# Altium PCB tach key h.PcbDoc
Units mm, origin at the board's own origin, x right, y up, seen from the top; angles counter-clockwise.
Board outline 151 x 86.38 mm, 2 copper layers (Top Layer, Bottom Layer); 48 components, 30 nets, 137 pads, 0 vias.
Unrouted connection lines stored in the file: 9.
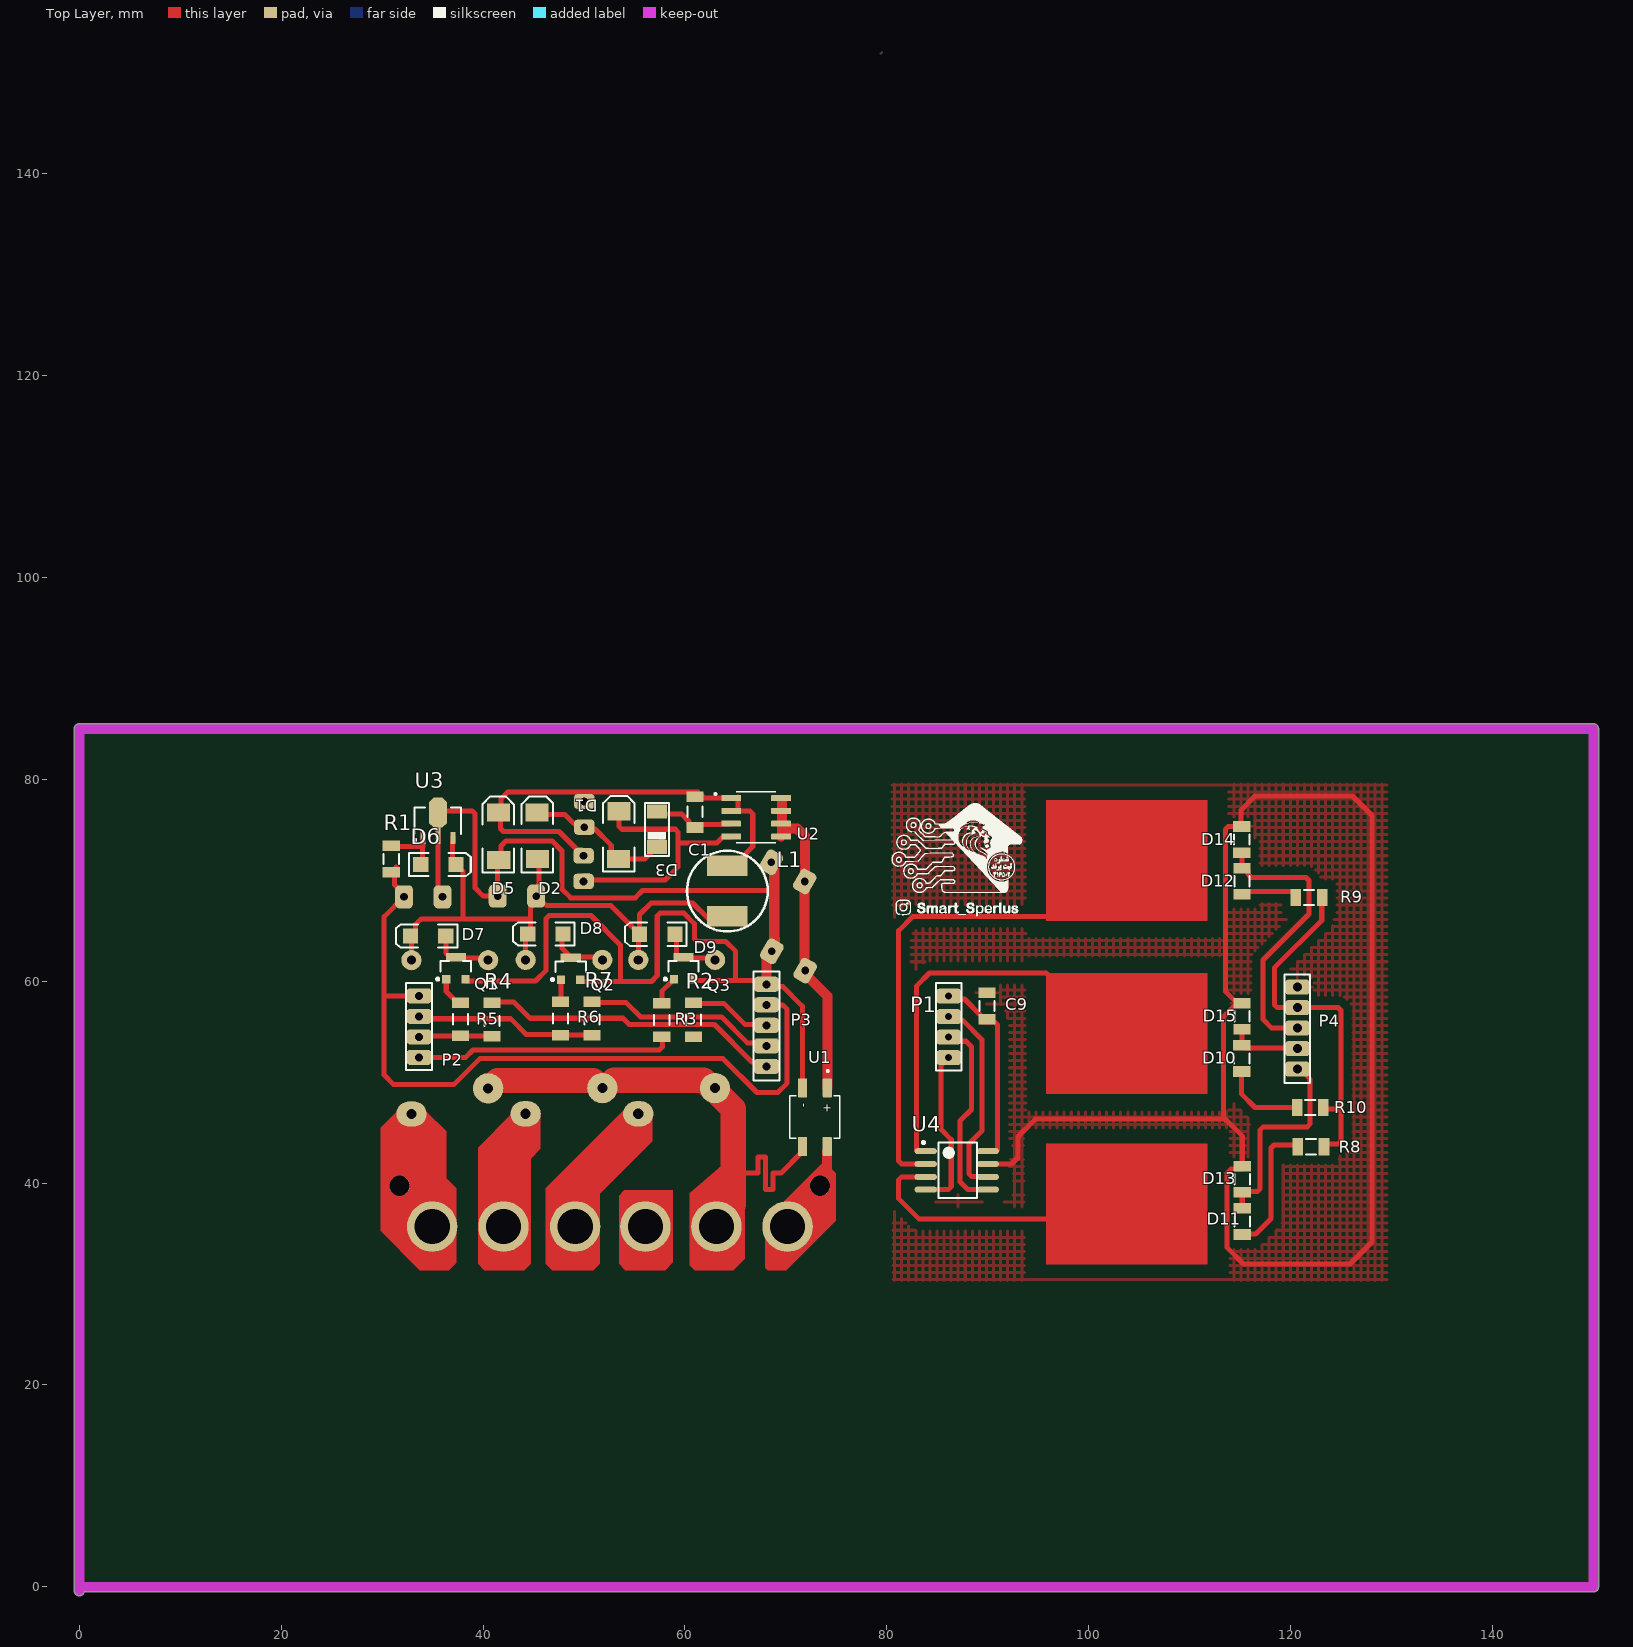
[diagram p0: Top Layer view]
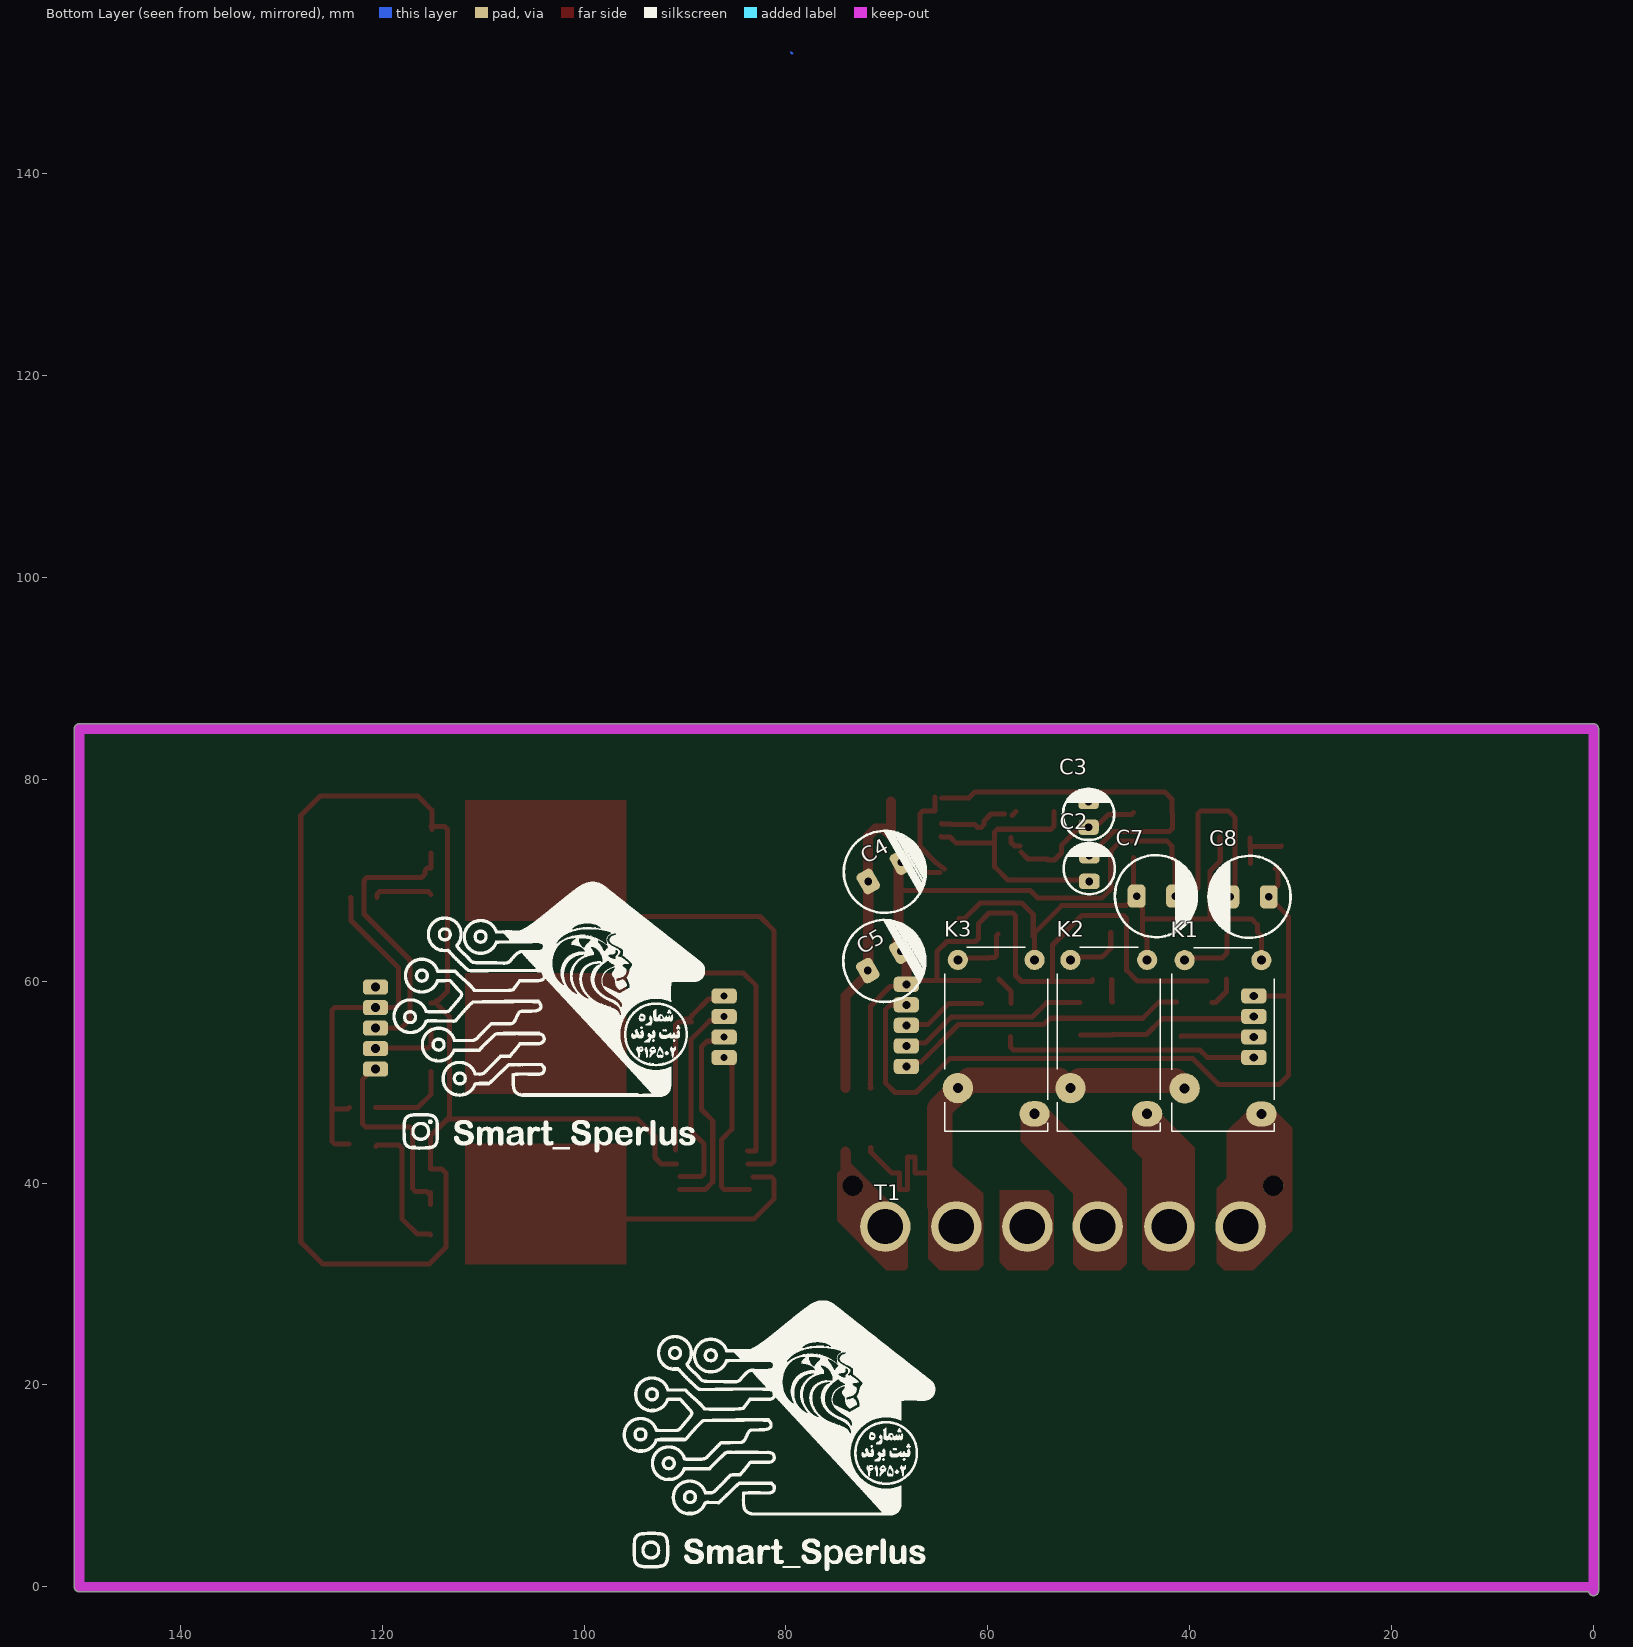
[diagram p1: Bottom Layer view, seen from below]
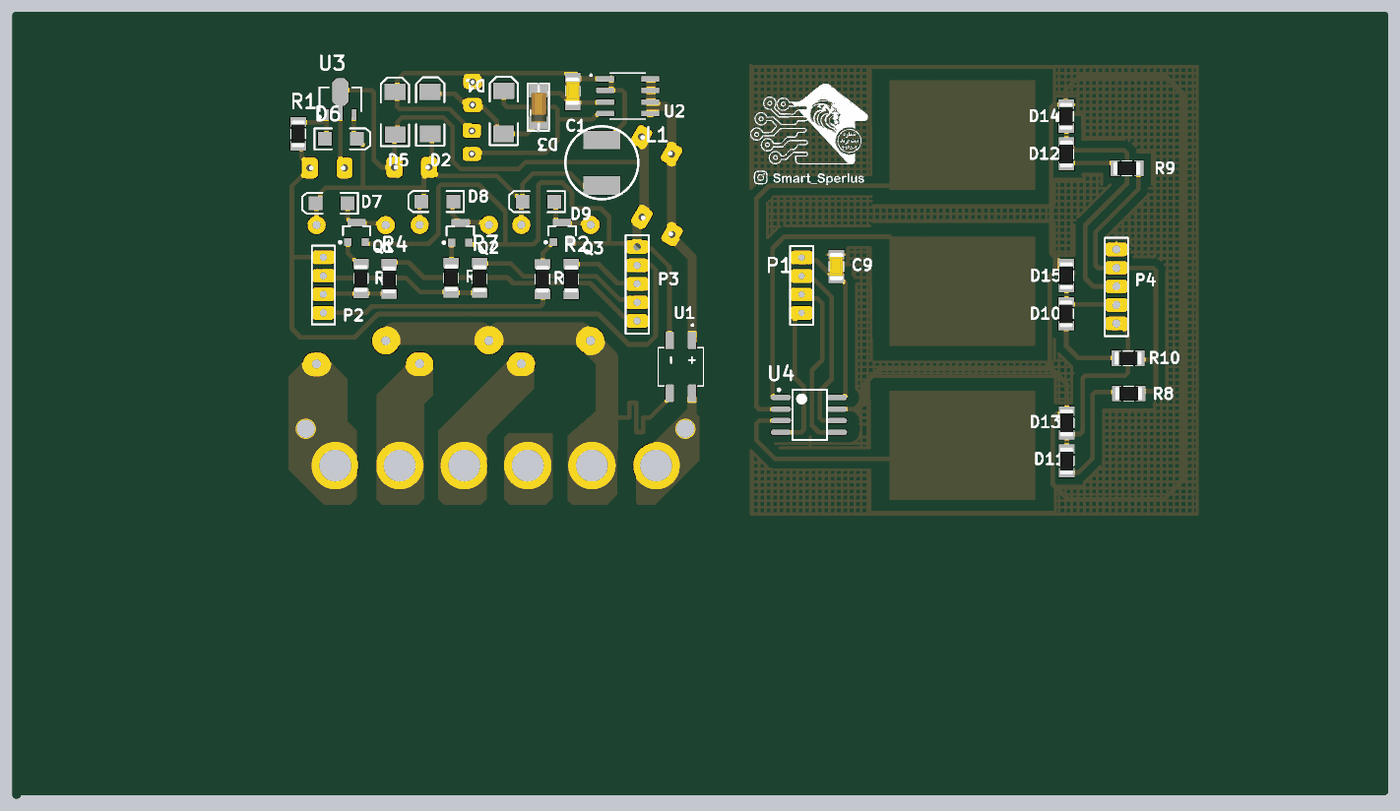
[diagram p2: 3D render of the assembled board from above, using the file's embedded part models]
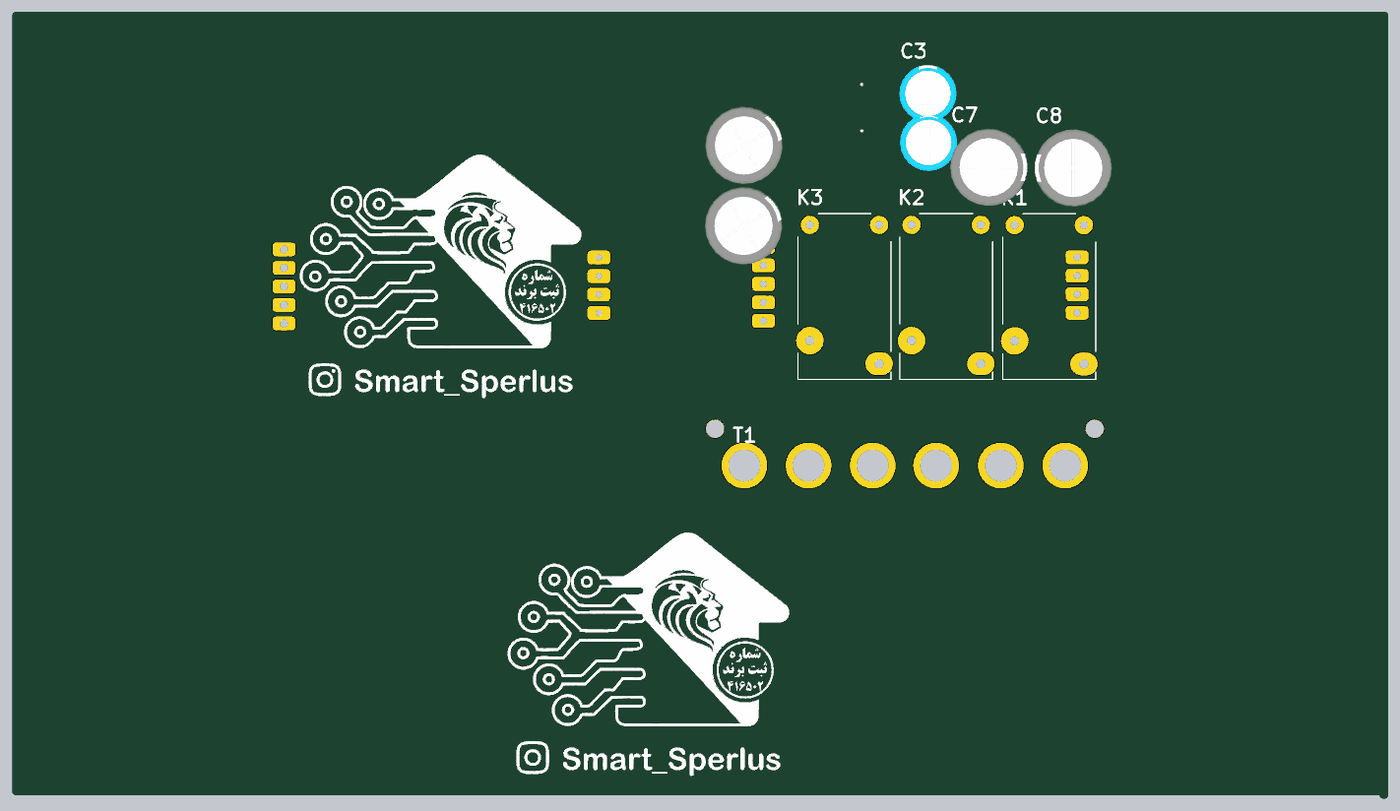
[diagram p3: 3D render of the assembled board from below, using the file's embedded part models]

## Layer stack, top to bottom
Top Solder: solder mask 0.0102, Solder Resist, Dk 3.5
Top Layer: signal copper 0.0356
Dielectric 1: dielectric 0.32, FR-4, Dk 4.8
Bottom Layer: signal copper 0.0356
Bottom Solder: solder mask 0.0102, Solder Resist, Dk 3.5

## Board outline
-0.5,-0.381 -0.5,85 cw(c0,85) 0,85.5 150,85.5 cw(c150,85) 150.5,85 150.5,0 cw(c150,0) 150,-0.5 0.486,-0.5 cw(c0,-0.381)

## Design rules (kind name [scope] priority, off if disabled: settings)
Clearance Clearance_1 [InPolygon] p1: gap=0.8 ignorepadtopadclearanceinfootprint=FALSE
Clearance [All] p2: gap=0.254 ignorepadtopadclearanceinfootprint=FALSE except(0: Arc-Hole Track-Hole SMDPad-Hole THPad-Hole Via-Hole Fill-Hole Poly-Hole Region-Hole Text-Hole)
PolygonConnect [All] p1: connectstyle=Relief reliefconductorwidth=0.254 reliefentries=4 polygonreliefangle="90 Angle" airgapwidth=0.254
RoomDefinition "tach key h" [InComponentClass('tach key h')] p1: confinementstyle=ConfineIn formatcopy=TRUE lockcomponents=FALSE outline 144.907,-4.953 247.904,-4.953 247.904,23.114 144.907,23.114
RoutingLayers [All] p1: top layer_v5=FALSE bottom layer_v5=TRUE
RoutingVias [All] p1: holewidth=0.711 width=2.5 viastyle="Through Hole" minholewidth=0.711 minwidth=1.27 maxholewidth=0.711 maxwidth=2
SolderMaskExpansion [All] p1: expansion=0.102 istentingtop=FALSE
SupplyNets "Schematic Supply Nets_2" [InNet('GND')] p1: voltage=0.000
SupplyNets "Schematic Supply Nets_1" [InNet('+12v')] p2: voltage=0.000
SupplyNets "Schematic Supply Nets" [InNet('vcc')] p3: voltage=0.000
Width [All] p1: maxlimit=3 minlimit=0.5 preferedwidth=1
29 further rules are at their usual default settings.

## Components (designator, comment, footprint, x,y, rotation, side; value= is the part's Value field where it differs from the comment)
C1 "=Value" "CAP 1206"#1 61,76.75 r90 top
C2 "=Value" ELEC-CAP-RAD10-20 49.95,71.15 r270 bottom
C3 "=Value" ELEC-CAP-RAD10-20 50.025,76.525 r270 bottom
C4 "=Value" ELEC-CAP-RAD15-30 70.2,70.825 r330 bottom
C5 "=Value" ELEC-CAP-RAD15-30 70.25,62 r330 bottom
C7 "=Value" ELEC-CAP-RAD15-30 43.35,68.425 r0 bottom
C8 "=Value" ELEC-CAP-RAD15-30 34.075,68.35 r180 bottom
C9 "=Value" "CAP 1206"#2 89.933,57.508 r90 top
D1 "D Schottky" SMB#1 53.45,74.45 r90 top
D2 "D Schottky" SMB#2 45.375,74.35 r90 top
D3 "Zener Diode" DO-35 57.259,77.557 r270 top
D5 "D Schottky" SMB#3 41.5,74.325 r90 top
D6 "D Tunnel1" 3.2X1.6X1.1 35.575,71.55 r0 top
D7 "D Tunnel1" 3.2X1.6X1.1 34.55,64.475 r180 top
D8 "D Tunnel1" 3.2X1.6X1.1 46.175,64.675 r180 top
D9 "D Tunnel1" 3.2X1.6X1.1 57.25,64.65 r180 top
D10 "MODEL" "RES 1206 (3216X08L)"#1 115.15,52.35 r90 top
D11 "MODEL" "RES 1206 (3216X08L)"#1 115.2,36.2 r90 top
D12 "MODEL" "RES 1206 (3216X08L)"#1 115.175,69.9 r90 top
D13 "MODEL" "RES 1206 (3216X08L)"#1 115.2,40.375 r90 top
D14 "MODEL" "RES 1206 (3216X08L)"#1 115.15,74.025 r90 top
D15 "MODEL" "RES 1206 (3216X08L)"#1 115.175,56.525 r90 top
K1 "2071508-1" RELAY_2071508-1 36.703,54.229 r270 bottom
K2 "2071508-1" RELAY_2071508-1 48.016,54.253 r270 bottom
K3 "2071508-1" RELAY_2071508-1 59.172,54.253 r270 bottom
L1 "1mH" HS1101 64.2,68.925 r90 top
P1 "Header 4" HDR1X4#1 86.123,51.666 r90 top
P2 "Header 4" HDR1X4#2 33.655,51.689 r90 top
P3 "Header 5" HDR1X5#1 68.072,50.546 r90 top
P4 "Header 5" HDR1X5#2 120.667,50.269 r90 top
Q1 "QNPN" SOT-23B_L 37.3,61.275 r90 top
Q2 "QNPN" SOT-23B_L 48.675,61.225 r90 top
Q3 "QNPN" SOT-23B_L 59.85,61.275 r90 top
R1 "10K" "RES 1206 (3216X08L)"#1 30.9,72.1 r90 top
R2 "10K" "RES 1206 (3216X08L)"#2 60.85,56.175 r270 top
R3 "10K" "RES 1206 (3216X08L)"#3 57.7,56.15 r270 top
R4 "10K" "RES 1206 (3216X08L)"#4 40.875,56.075 r270 top
R5 "10K" "RES 1206 (3216X08L)"#3 37.775,56.226 r270 top
R6 "10K" "RES 1206 (3216X08L)"#3 47.675,56.3 r270 top
R7 "10K" "RES 1206 (3216X08L)"#4 50.8,56.2 r270 top
R8 "10K" "RES 1206 (3216X08L)"#1 122,43.6 r0 top
R9 "10K" "RES 1206 (3216X08L)"#1 121.81,68.303 r0 top
R10 "10K" "RES 1206 (3216X08L)"#1 121.937,47.475 r0 top
T1 "Phoenix terminal" "phoenix terminal 6" 69.016,24.004 r180 bottom
U1 "MB6S" SOIC245P670X270-4N 72.875,46.525 r270 top
U2 "HT7A6312" SOIC127P599X175-8N 67.05,76.232 r0 top
U3 "LM1117MP-3.3" SOT89L 35.525,75.9 r90 top
U4 "ATtiny15L-1SC" 8S2_N 87.025,41.25 r0 top

## Footprints (in the part's own frame and the unit in brackets; to place one, negate y for a bottom-side part, rotate by r counter-clockwise, add the part's x,y. Pads: shape width x height; smd on the part's side, far side on the other; paste and mask are expansions set on the pad)
3.2X1.6X1.1 [mm] "SMT LED; 2 Flat Leads"
  rect 1.5x1.5 smd: 1(-1.75,0) 2(1.75,0)
  silkscreen extent -2.9,-1.15 3.2,1.15
8S2_N [mm] "SOP, 8-Leads, Body 5.3x5.3mm, Pitch 1.27mm, IPC Medium Density"
  oval 2.2x0.6 smd: 1(-3.175,1.905) 2(-3.175,0.635) 3(-3.175,-0.635) 4(-3.175,-1.905) 5(2.975,-1.905) 6(2.975,-0.635) 7(2.975,0.635) 8(2.975,1.905)
  silkscreen extent -3.52,-2.75 1.9,2.88, body extent -2.73,-2.75 2.73,2.75, height 2.16
"CAP 1206"#1 [mm]
  rect 1.05x1.7 smd: 1(-1.524,0) 2(1.524,0)
  silkscreen extent -0.47,-0.75 0.53,0.75, body extent -1.49,-0.77 1.55,0.75, height 0.75
"CAP 1206"#2 [mm]
  rect 1.05x1.7 smd: 1(-1.27,0) 2(1.326,0)
  silkscreen extent -0.47,-0.75 0.53,0.75, body extent -1.49,-0.77 1.55,0.75, height 0.75
DO-35 [mm]
  rect 1.397x2 smd: 1(0.765,-0.027) 2(4.265,-0.027)
  silkscreen extent -0.07,-1.2 5.15,1.15, body extent -0.17,-0.81 5.35,0.84, height 1.81
ELEC-CAP-RAD10-20 [mil]
  rrect50% 60x80 hole 30: 1(-50,0) 2(50,0)
  silkscreen extent -100,-100 100,100, body extent -124,-124 124,124, height 404
ELEC-CAP-RAD15-30 [mil]
  rrect50% 70x90 hole 30: 1(-75,0) 2(75,0)
  silkscreen extent -160,-160 160,160, body extent -167,-167 167,167, height 609
HDR1X4#1 [mm] "Connector; Header; 4 Position"
  rrect50% 1.5x2.5 hole 0.7: 1(0.762,0) 2(2.794,0) 3(4.826,0) 4(6.858,0)
  silkscreen extent -0.51,-1.27 8.13,1.27
HDR1X4#2 [mm] "Connector; Header; 4 Position"
  rrect50% 1.5x2.5 hole 0.8: 1(0.762,0) 2(2.794,0) 3(4.826,0) 4(6.858,0)
  silkscreen extent -0.51,-1.27 8.13,1.27
HDR1X5#1 [mm] "Connector; Header; 5 Position"
  rrect50% 1.5x2.5 hole 0.8: 1(1.016,0) 2(3.048,0) 3(5.08,0) 4(7.112,0) 5(9.144,0)
  silkscreen extent -0.38,-1.27 10.41,1.27
HDR1X5#2 [mm] "Connector; Header; 5 Position"
  rrect50% 1.5x2.5 hole 0.9: 1(1.016,0) 2(3.048,0) 3(5.08,0) 4(7.112,0) 5(9.144,0)
  silkscreen extent -0.38,-1.27 10.41,1.27
HS1101 [mm] "HUMIDITY SENSOR"
  rect 2x4 smd: 1(2.5,0) 2(-2.5,0)
  silkscreen extent -4,-4 4,4
"phoenix terminal 6" [mm] "6 terminals"
  round 5 hole 3.5: 1(-1.143,11.684) 2(5.897,11.684) 3(12.937,11.684) 4(19.897,11.684) 5(26.997,11.684) 6(34.057,11.684)
RELAY_2071508-1 [mm]
  round 2 hole 0.9: 1(-7.85,3.8) 2(-7.85,-3.8)
  oval 2.5x3 hole 1: 3(7.39,3.8)
  round 3 hole 1: 4(4.85,-3.8)
  silkscreen extent -9.1,-5.1 9.1,5.1
"RES 1206 (3216X08L)"#1 [mm] "Chip Resistor, 2-Leads, Body 3.2x1.6mm, IPC High Density _ (0.125 W)"
  rect 1.05x1.7 smd: 1(-1.295,0) 2(1.301,0)
  silkscreen extent -0.5,-0.75 0.5,0.75, body extent -1.52,-0.76 1.53,0.76, height 0.6
"RES 1206 (3216X08L)"#2 [mm] "Chip Resistor, 2-Leads, Body 3.2x1.6mm, IPC High Density _ (0.125 W)"
  rect 1.05x1.7 smd: 1(-1.675,0) 2(1.7,0)
  silkscreen extent -0.5,-0.75 0.5,0.75, body extent -1.52,-0.76 1.53,0.76, height 0.6
"RES 1206 (3216X08L)"#3 [mm] "Chip Resistor, 2-Leads, Body 3.2x1.6mm, IPC High Density _ (0.125 W)"
  rect 1.05x1.7 smd: 1(-1.651,0) 2(1.651,0)
  silkscreen extent -0.5,-0.75 0.5,0.75, body extent -1.52,-0.76 1.53,0.76, height 0.6
"RES 1206 (3216X08L)"#4 [mm] "Chip Resistor, 2-Leads, Body 3.2x1.6mm, IPC High Density _ (0.125 W)"
  rect 1.05x1.7 smd: 1(-1.775,0) 2(1.55,0)
  silkscreen extent -0.5,-0.75 0.5,0.75, body extent -1.52,-0.76 1.53,0.76, height 0.6
SMB#1 [mm] "DO-214-AA/SMB; 2 C-Bend Leads; Body 5.3 x 3.6 mm, inc. leads (LxW)"
  rect 1.8x2.3 smd: 1(-2.35,0.025) 2(2.375,0)
  silkscreen extent -3.6,-1.55 3.9,1.55
SMB#2 [mm] "DO-214-AA/SMB; 2 C-Bend Leads; Body 5.3 x 3.6 mm, inc. leads (LxW)"
  rect 1.8x2.3 smd: 1(-2.254,0) 2(2.371,0.025)
  silkscreen extent -3.58,-1.55 3.95,1.55
SMB#3 [mm] "DO-214-AA/SMB; 2 C-Bend Leads; Body 5.3 x 3.6 mm, inc. leads (LxW)"
  rect 1.8x2.3 smd: 1(-2.325,-0.05) 2(2.375,-0.025)
  silkscreen extent -3.57,-1.55 3.95,1.55
SOIC127P599X175-8N [mm]
  rrect25% 1.97x0.6 smd: 1(-2.47,1.905) 2(-2.47,0.635) 3(-2.47,-0.635) 4(-2.47,-1.905) 5(2.47,-1.905) 6(2.47,-0.635) 7(2.47,0.635) 8(2.47,1.905)
  silkscreen extent -4.14,-2.52 1.95,2.52
SOIC245P670X270-4N [mm]
  rrect23% 1.91x0.91 smd: 1(-2.9,1.225) 2(-2.9,-1.225) 3(2.9,-1.225) 4(2.9,1.225)
  silkscreen extent -4.68,-2.48 2.1,2.48
SOT89L [mm] "SOT89, 3-Leads, Body 4.5x2.4 mm, Pitch 1.5mm, Lead Span 4.1mm, IPC High Density"
  rect 1.2x0.5 smd: 1(-1.7,1.5) 3(-1.7,-1.5)
  rect 1.6x0.5 smd: 2(-1.5,0)
  oct 3x1.8 smd: 2(0.8,0)
  silkscreen extent -2.07,-2.3 1.3,2.42, body extent -1.3,-2.3 1.3,2.3, height 1.6
SOT-23B_L [mm] "SOT23, 3-Leads, Body 2.9x1.3mm, Pitch 0.95mm, Lead Span 2.4mm, IPC High Density"
  rect 0.85x0.8 smd: 1(-1.075,0.95) 2(-1.075,-0.95)
  rect 0.85x2 smd: 3(1.075,0)
  silkscreen extent -1.2,-1.5 0.7,1.92, body extent -0.7,-1.5 0.7,1.5, height 1.14

## Part data
C1 C9: library part Capacitor, "Capacitor"
C2 C3 C4 C5 C7 C8: library part "Capacitor Electrolytic", "Electrolytic Capacitor"
D1 D2 D5: "Schottky Diode", Code_JEDEC=DO-214-AA, LatestRevisionDate=17-Jul-2002, LatestRevisionNote="Re-released for DXP Platform.", PackageDescription="DO-214-AA/SMB; 2 C-Bend Leads; Body 5.3 x 3.6 mm, inc. leads (LxW)", PackageReference=SMB, Published=8-Jun-2000, Publisher="Altium Limited", Simulation ModelName=SKYDIODE, Simulation PortMap=(1:1),(2:2)
D6 D7 D8 D9: "Tunnel Diode - RLC Model", LatestRevisionDate=17-Jul-2002, LatestRevisionNote="Re-released for DXP Platform.", PackageDescription="SM LED; 2 Flat Leads", PackageReference=3.2X1.6X1.1, PackageVersion=Feb-2002, Published=8-Jun-2000, Publisher="Altium Limited", Simulation ModelName=DTUNNEL1, Simulation PortMap=(1:1),(2:2)
D10 D11 D12 D13 D14 D15: library part "LED 5mm", "Typical LED", COLOR=RED
K1 K2 K3: "Power Relay 5VDC 10A SPST-NO(18.2mm 10.2mm 15.2mm) THT", Package=Package, Availability=Unavailable, MF="TE Connectivity", MP=2071508-1, Price=None, SnapEDA_Link=https://www.snapeda.com/parts/2071508-1/TE%20Connectivity/view-part/4717165/?ref=snap
L1: library part Inductor, "Inductor", Code_IEC=1005, Code_JEITA=0402, LatestRevisionDate=17-Jul-2002, LatestRevisionNote="Re-released for DXP Platform.", PackageReference=0402-A, Published=8-Jun-2000, Publisher="Altium Limited", Simulation ModelName=INDUCTOR, Simulation PortMap=(1:1),(2:2)
P1 P2: "Header, 4-Pin", LatestRevisionDate=17-Jul-2002, LatestRevisionNote="Re-released for DXP Platform.", Publisher="Altium Limited"
P3 P4: "Header, 5-Pin", LatestRevisionDate=17-Jul-2002, LatestRevisionNote="Re-released for DXP Platform.", Publisher="Altium Limited"
Q1 Q2 Q3: "NPN Bipolar Transistor", LatestRevisionDate=29-May-2009, LatestRevisionNote="IPC-7351 Footprint Added.", PackageDescription="3-Pin SOT-23 Package 0.95 mm Pitch, 2.4 mm Lead Span", PackageReference=SOT-23B, PackageVersion=Aug-1999, Published=8-Jun-2000, Publisher="Altium Limited", Simulation ModelName=QNPN, Simulation PortMap=(1:1),(2:2),(3:3)
R1 R2 R3 R4 R5 R6 R7 R8 R9 R10: library part Resistor, "Resistor", Power="1/4 W", Tolerance=5%, Simulation ModelName="Model Name", Simulation PortMap=(1:1),(2:2)
T1: library part "Phoenix terminal 6", "Terminal 6 Pin", ComponentLinkURL=www.picpars.com, Designer="Seyed Mohsen Ghasemain", E-mail=picpars@gmail.com
U1: "Bridge Rectifier Single Phase Standard 600V Surface Mount 4-SOIC", Package="BESOP-4 Surge Components", Digi-Key_Part_Number=MB6SCT-ND, Digi-Key_Purchase_URL=https://www.digikey.com.tr/product-detail/en/on-semiconductor/MB6S/MB6SCT-ND/965654?utm_source=snapeda&utm_medium=aggregator&utm_campaign=symbol, MF="ON Semiconductor", MP=MB6S, SnapEDA_Link=https://www.snapeda.com/parts/MB6S/ON%20Semiconductor/view-part/2774209/?ref=snap
U2: library part Component_1
U3: "800mA Low-Dropout Linear Regulator", DigiKeyPartNumber=LM1117MP-3.3CT-ND, Manufacturer="National Semiconductor", PackageTopMarking=XYTT*N05A, PowerWise=N, Code_IPC=SOT223-4, Code_JEDEC=TO-261-AA, ComponentLink1Description="LM1117 Datasheet", ComponentLink1URL=http://www.national.com/ds/LM/LM1117.pdf, ComponentLink2Description="LM1117 Web Page", ComponentLink2URL=http://www.national.com/pf/LM/LM1117.html, ComponentLink3Description="MP04A Package Page", ComponentLink3URL=http://www.national.com/packaging/folders/mp04a.html, CompType="LDO IC", DatasheetVersion=Apr-2006, PackageDescription="Molded SOT-223, 6.50 x 3.56 x 1.6mm Body, 4 Lead, 2.3mm Pitch", PackageReference=MP04A, PackageVersion="revB, Apr-2003", PartNumber=LM1117MP-3.3, PinCount=4, Published=4-Dec-2008, Publisher="Altium Limited", RoHS=O
U4: "8-Bit AVR Microcontroller with 1K Byte of Flash Memory", Supplier Part Number 1=ATTINY15L-1SC-ND, ComponentLink1Description=Datasheet, ComponentLink1URL=http://www.atmel.com/dyn/resources/prod_documents/doc1187.pdf, ComponentLink2Description="Atmel.com Home", ComponentLink2URL=http://www.atmel.com, DatasheetVersion=1187E-AVR-06/02, LatestRevisionDate=16-Oct-2006, LatestRevisionNote="IPC-7351 Footprint Added.", PackageDescription="8-Lead, 0.208\" Body, Plastic Small Outline Package (EIAJ)", PackageReference=8S2, PackageVersion="revF, Apr-2008", Published=17-Sep-2003, Publisher="Altium Limited", Supplier 1=Digi-Key, Supplier 2=Mouser, Supplier Part Number 2=556-ATTINY15L1SC
D3: MODEL=1N

## Free pads (board coordinates)
  round 2 hole 2: 156(31.725,39.725) 157(73.375,39.725)

## Nets (pads, with @x,y where several pads share a name; then routed paths per layer and width w, separated by ;. In a path a pad name is that pad's centre, name@x,y a point inside that pad or via, vN(x,y) a via of type N, cw(c..) or ccw(c..) an arc to the next point about the centre after c; other vN are vias at no path point)
+12v: C7.2 D2.1 D6.2 D7.2 D8.2 D9.2 K1.1 K2.1 K3.1 L1.2 U3.3 | length 59.2
  Top Layer w0.5: K1.1 32.903,64.475 33.3,64.872 33.3,65.6 33.875,66.175 38,66.175 ; U3.3@37.025,74.274 37.025,73.85 36.975,73.8 36.975,71.9 38,70.875 38,66.175 ; K2.1 D8.2@44.216,64.4 ; D8.2@44.4,64.4 44.675,64.675 44.675,66.175 ; C7.2 45.255,68.276 45.879,67.652 46.12,67.652 46.297,67.475 52.675,67.475 D9.2 55.5,66.6 56.65,67.75 60.75,67.75 62.275,66.225 L1.2@62.85,66.225 ; D2.1@45.55,72.257 45.55,69.611 45.5,69.56 45.5,68.408 45.55,68.357 45.55,68.12 44.675,67.245 44.675,66.175 ; K3.1 55.372,64.322 D9.2@55.5,64.45 ; 38,66.175 44.675,66.175
faz: K1.4 K2.4 K3.4 T1.2 U1.3 | length 55
  Top Layer w0.5: 64.77,40.975 66.925,40.975 ; 66.975,40.975 67.225,40.975 ; U1.3@71.6,43.525 71.6,43.075 69.5,40.975 69.3,40.975 68.733,40.975 68.733,39.368 67.979,39.368 67.979,42.588 67.225,42.588 ; 67.225,40.975 67.225,42.588 ; 67.225,40.975 67.225,41.275 67.225,42.588
  Top Layer w2.5: K1.4 40.638,49.379 41.424,50.165 50.919,50.165 51.681,49.403 K2.4 ; K2.4@52.95,50.175 61.846,50.175 62.523,49.499 62.876,49.499 K3.4 ; K3.4@62.972,49.169 64.77,47.371 64.77,40.975 64.77,37.839 63.119,36.188 T1.2 ; T1.2@63.246,34.237 T1.2@63.246,35.688
  Bottom Layer w0.5: K1.4 K1.4@40.606,49.276
GND: C4.1 C5.1 C7.1 C8.1 C9.2 D5.1 D13.2 D14.2 D15.2 P3.5 P4.5 Q1.2 Q2.2 Q3.2 U1.2 U3.2 U4.7 | length 290.2
  Top Layer w0.5: C8.1 35.98,68.95 35.525,69.405 35.525,74.4 35.525,75.925 35.5,75.95 35.5,76.2 36.175,76.875 38.907,76.875 39.2,76.582 39.2,69.25 40.025,68.425 C7.1 D5.1@41.445,71.935 ; C8.1@36.225,68.12 C8.1@36.23,68.125 ; Q1.2@38.3,60.025 45.2,60.025 46.25,61.075 46.25,66.207 46.543,66.5 50.682,66.5 53.594,63.588 53.594,59.975 ; D5.1 41.775,72.225 41.775,73.4 42.275,73.9 46.825,73.9 47.825,72.9 47.825,69.1 48.675,68.25 55.075,68.25 55.8,68.975 68.838,68.975 ; Q2.2 49.625,60.025 49.675,59.975 53.594,59.975 ; Q3.2@60.816,60.059 65.025,60.059 ; P3.5@67.703,60.059 65.025,60.059 ; P3.5@68.332,59.95 68.818,59.464 69.686,59.464 71.625,57.525 U1.2@71.625,49.837 ; U1.2 cw(c71.746,49.916) 71.649,49.425 71.571,49.441 U1.2@71.65,49.837 ; U4.7@90.822,41.887 92.346,41.887 92.981,42.522 92.981,44.619 94.694,46.332 113.35,46.332 ; D15.2@114.425,57.551 113.35,56.476 113.35,46.332 ; D14.2@115.079,75.014 D14.2@115.079,75.326 ; D14.2 D14.2@115.079,75.326 ; D15.2 114.7,57.826 114.7,57.976 114.575,58.101 114.425,58.101 113.525,59.001 113.525,75.033 113.818,75.326 D14.2@115.079,75.326 ; 53.594,59.975 56.673,59.975 57.25,60.552 57.25,66.457 57.543,66.75 59.875,66.75 60.925,65.7 60.925,64.218 61.218,63.925 64.05,63.925 65.025,62.95 65.025,60.059 ; 113.35,46.332 113.555,46.332 113.555,46.205 113.682,46.205 115.206,44.681 115.206,41.41 115.197,41.401 114.101,41.401 113.682,40.982 113.682,33.632 115.333,31.981 125.874,31.981 128.064,34.171 128.064,76.4 126.128,78.336 116.476,78.336 115.079,76.939 D14.2@115.079,75.326
  Top Layer w1: P3.5 P3.5@68.072,60.059 ; P3.5@68.072,59.94 C5.1@68.072,62.722 ; C5.1@68.838,63.412 68.934,63.508 68.934,64.226 68.838,64.321 68.838,68.975 68.838,71.453 68.722,71.568 68.722,71.923 C4.1@68.838,72.039
NetC1_1: C1.1 D3.1 U2.3 | length 7.3
  Top Layer w0.5: D3.1 D3.1@57.611,76.414 ; 58.355,76.55 59.676,76.55 60.4,75.826 60.4,75.501 C1.1@60.675,75.226 ; C1.1 61.275,75.501 61.875,75.501 61.893,75.519 63.614,75.519 63.642,75.547 64.53,75.547 U2.3
NetC1_2: C1.2 C2.1 C3.1 D5.2 L1.1 U2.1 U2.2 | length 47.1
  Top Layer w0.5: C2.1@49.729,73.041 49.309,73.041 47.525,74.825 42.018,74.825 41.725,75.118 41.725,76.675 41.757,76.707 41.757,78.032 42.475,78.75 49.875,78.75 ; C3.1@49.875,77.807 49.875,78.75 ; C3.1@50.025,77.437 C3.1 ; L1.1@64.3,71.125 65.164,71.75 66.712,73.336 66.712,76.574 66.419,76.867 65.25,76.867 U2.1@65.25,78.25 ; U2.1 61.888,78.137 61.538,78.487 61.275,78.75 49.875,78.75 ; L1.1@64.735,70.763 L1.1@65.863,70.763
NetC2_2: C2.2 D1.2 U2.4 | length 26.7
  Top Layer w0.5: C2.2@49.933,70.447 50.464,70.447 50.886,70.025 58.025,70.025 59.325,71.325 59.325,73.7 ; D1.2 53.45,75.343 53.743,75.05 59.032,75.05 59.325,74.757 59.325,73.7 ; U2.4@64.646,74.325 64.599,74.277 63.752,74.277 63.175,73.7 59.325,73.7
NetC3_2: C3.2 D1.1 D2.2 D3.2 | length 15.4
  Top Layer w0.5: D2.2@45.55,76.721 45.771,76.5 48.075,76.5 48.895,75.68 48.931,75.68 49.54,75.071 51.079,75.071 52.693,73.457 52.693,72.702 53.395,72 D1.1@54.075,72 ; D1.1@54.075,72.1 56.014,72.1 D3.2@56.731,72.817 ; D3.2@56.813,73.41 57.364,73.41 57.696,73.741 57.696,74.238
NetC4_2: C4.2 C5.2 U1.1 U2.5 U2.6 U2.7 U2.8 | length 31.9
  Top Layer w1: U2.5 70.302,75.109 71.13,75.109 71.875,74.364 71.875,70.056 71.851,70.032 71.851,69.27 71.847,69.266 71.847,68.629 71.851,68.625 71.851,61.994 71.878,61.966 71.878,61.069 C5.2 ; U2.5@69.6,74.527 69.6,75.597 69.6,76.545 69.6,77.815 ; C5.2@71.875,60.759 74.1,58.534 U1.1
NetD7_1: D7.1 K1.2 Q1.3 | length 6.2
  Top Layer w0.5: D7.1@36.307,64.593 36.307,62.768 36.8,62.275 Q1.3@37.35,62.275 ; Q1.3@37.425,62.275 40.307,62.275 K1.2
NetD8_1: D8.1 K2.2 Q2.3 | length 6.1
  Top Layer w0.5: D8.1@47.825,64.825 47.825,63.25 48.6,62.475 48.625,62.475 48.695,62.405 48.695,62.38 51.539,62.38 K2.2
NetD9_1: D9.1 K3.2 Q3.3 | length 6.2
  Top Layer w0.5: D9.1 59.15,64.5 59.15,62.525 59.325,62.35 Q3.3 59.9,62.3 62.775,62.3 K3.2
NetD10_1: D10.1 R10.1 | length 8.3
  Top Layer w0.5: D10.1 115.15,48.801 116.476,47.475 R10.1
NetD11_1: D11.1 R8.1 | length 13.3
  Top Layer w0.5: D11.1@115.2,34.875 115.258,34.933 116.507,34.933 118.05,36.476 118.05,43.482 118.343,43.775 120.48,43.775 R8.1@120.63,43.625
NetD12_1: D12.1 R9.1 | length 5.9
  Top Layer w0.5: D12.1 115.45,68.88 120.24,68.88 120.515,68.605 R9.1
NetP2_1: P2.1 R2.2 R3.2 | length 25.5
  Top Layer w0.5: P2.1 38.276,52.451 39,53.175 57.457,53.175 57.75,53.468 R3.2@57.75,54.499
NetP2_2: P2.2 R4.2 R5.2 | length 7.3
  Top Layer w0.5: P2.2 33.747,54.575 R5.2 37.8,54.55 40.85,54.55 R4.2
NetP2_3: P2.3 R6.2 R7.2 | length 17.9
  Top Layer w0.5: P2.3 33.895,56.275 42.725,56.275 44.275,54.725 R6.2@47.675,54.725 ; R6.2@47.676,54.649 R7.2
nol: pad.157 T1.1 U1.4 | length 9.8
  Top Layer w1: T1.1 70.764,36.293 71.943,36.293 73.375,37.725 73.375,39.867 74.075,40.567 74.075,42.845 74.08,42.85 U1.4@74.08,43.145
o1: P1.1 P3.1 R4.1 U4.4 | length 45.8
  Top Layer w0.5: R4.1@41.325,57.955 43.02,57.955 44.65,56.325 53.85,56.325 54.464,55.711 62.914,55.711 66.647,51.978 67.931,51.978 P3.1@68.434,51.475 ; U4.4@83.625,39.345 86.082,39.345 86.375,39.638 86.375,44.302 85.361,45.316 85.361,51.684 85.851,52.174 P1.1@85.869,52.174
o2: P1.2 P3.2 R7.1 U4.5 | length 39.4
  Top Layer w0.5: R7.1@50.895,57.875 54.175,57.875 55.585,56.465 63.61,56.465 66.181,53.894 P3.2@68.393,53.894 ; P1.2@85.869,54.206 86.027,54.048 87.827,54.048 88.375,53.5 88.375,47.289 87.25,46.164 87.25,40.125 88.028,39.347 U4.5@90.539,39.347
o3: P1.3 P3.3 R2.1 U4.6 | length 28.9
  Top Layer w0.5: R2.1@60.637,57.8 63.85,57.8 65.965,55.685 68.013,55.685 P3.3 ; P1.3 86.535,56.08 87.551,56.08 89.425,54.206 89.425,45.189 88.125,43.889 88.125,40.929 88.418,40.636 U4.6@90.499,40.636
o11: Q1.1 R5.1 | length 3.1
  Top Layer w0.5: Q1.1 36.35,58.977 37.45,57.877 R5.1
o21: D11.2 D13.1 P4.1 | length 19.9
  Top Layer w0.5: D13.1 115.38,38.9 115.38,38.934 115.595,39.15 116.691,39.15 116.984,39.443 116.984,45.277 117.277,45.57 121.644,45.57 121.937,45.863 121.937,50.269 P4.1@120.921,51.285 ; D11.2@115.206,37.854 D13.1@115.206,38.814
o22: D10.2 D15.1 P4.2 Q2.1 R6.1 | length 9.5
  Top Layer w0.5: R6.1 47.725,58.001 Q2.1 ; D10.2 115.425,53.376 120.608,53.376 P4.2 ; D10.2@115.175,53.651 D15.1
o23: D12.2 D14.1 P4.3 | length 29.2
  Top Layer w0.5: D14.1@115.175,72.705 D12.2 115.5,71.201 115.775,70.926 115.775,70.601 116.101,70.275 121.517,70.275 121.81,69.982 121.81,66.652 117.25,62.092 117.25,56.225 118.126,55.349 P4.3@121.589,55.349
o33: Q3.1 R3.1 | length 2.9
  Top Layer w0.5: R3.1 57.7,59 58.725,60.025 58.75,60.025 58.9,60.175 Q3.1
of1: K1.3 pad.156 T1.6 | length 12.1
  Top Layer w1.5: T1.6@34.268,36.379 34.497,36.379 34.959,35.917 T1.6
  Top Layer w2.5: K1.3 32.893,46.829 32.893,37.754 T1.6@34.268,36.379
of2: K2.3 T1.5 | length 12.6
  Top Layer w2.5: T1.5@42.019,35.2 42.019,43.219 43.966,45.166 43.966,46.613 K2.3
of3: K3.3 T1.4 | length 13.8
  Top Layer w2.5: T1.4 49.119,40.61 K3.3
VCC: C8.2 C9.1 D6.1 P1.4 P2.4 P3.4 P4.4 R1.1 R1.2 R8.2 R9.2 R10.2 U3.1 U4.8 | length 138.6
  Top Layer w0.5: R1.2 30.941,73.36 34.025,73.36 34.025,73.85 U3.1 ; R1.1@31.175,71.08 31.238,71.016 31.238,69.536 32.17,68.604 C8.2 30.2,66.38 30.2,58.547 ; 31.35,71.33 R1.1@31.525,71.155 ; P2.4 30.2,58.547 ; D6.1@34,71.639 34,73.36 ; P3.4 69.667,57.658 70.117,57.208 70.117,49.892 69.2,48.975 67.125,48.975 63.775,52.325 39.675,52.325 37.1,49.75 31.15,49.75 30.2,50.7 30.2,58.547 ; P1.4 86.408,58.239 87.678,58.239 89.333,56.584 89.333,56.513 89.608,56.238 C9.1 ; C9.1@89.375,55.963 90.656,55.963 90.949,55.67 U4.8@90.949,43.284 ; R9.2 123.08,68.272 123.08,66.017 118.381,61.318 118.381,57.674 118.674,57.381 P4.4 124.692,57.381 124.985,57.088 124.985,47.348 ; R10.2 123.365,47.348 124.985,47.348 ; R8.2@123.291,43.85 124.692,43.85 124.985,44.143 124.985,47.348
pads on no net: T1.3 U4.1 U4.2 U4.3
copper on no net: | length 114.2
  Top Layer w0.5: 83.265,40.617 81.463,40.617 81.17,40.324 81.17,38.458 83.202,36.426 102.284,36.426 103.777,37.919 ; 83.739,41.887 81.463,41.887 81.17,42.18 81.17,65.001 82.567,66.398 98.972,66.398 104.664,72.09 ; 83.811,43.157 82.994,43.157 82.948,43.203 82.948,59.54 84.218,60.81 95.777,60.81 97.491,59.096 98.252,59.096
  Top Layer w1: 56.099,35.18 56.099,35.33
  Bottom Layer w0.2: 79.375,151.892 79.502,152.019

## Polygon pours and split planes (outlines as drawn)
GND on Top Layer "GND_L01_P-001" (hatched 90Degree grid 0.7 track 0.3, remove dead copper, pour order 0): 80.525,79.6 80.6,79.525 129.525,79.525 129.525,30.375 129.475,30.325 80.6,30.325

## Keep-outs
Keep-Out Layer:
  lines w1: 0,-0.381 0,85 150,85 150,0 0,0

## Other copper
Top Layer:
  region: 111.777,48.81 111.777,60.81 95.777,60.81 95.777,48.81
  region: 111.777,65.955 111.777,77.955 95.777,77.955 95.777,65.955
  region: 111.777,31.919 111.777,43.919 95.777,43.919 95.777,31.919
  region net nol: 70.045,31.37 74.93,36.255 74.93,40.995 73.925,42 73.625,42 67.945,36.32 67.945,31.624 68.199,31.37
  region net of1: 29.845,40.641 29.845,35.255 33.73,31.37 36.576,31.37 37.325,32.119 37.325,36.336 33.02,40.641
  region net of1: 29.845,40.167 29.845,45.47 31.45,47.075 34.375,47.075 36.325,45.125 36.325,40.5 37.325,39.5 37.325,34.351
  region net of2: 39.497,39.497 39.497,32.005 40.132,31.37 44.069,31.37 44.704,32.005 44.704,38.99 44.197,39.497
  region net of2: 39.5,39.2 39.5,43.5 42.85,46.85 45.675,46.85 45.675,43.4 44.704,42.429 44.704,38.99
  region net of3: 56.75,46.875 56.75,44.15 51.15,38.55 50.25,39.45 46.7,39.45 46.7,39.975 54.175,47.45 54.375,47.45
  region net of3: 46.228,37.593 46.228,32.005 46.863,31.37 50.927,31.37 51.562,32.005 51.562,35.434
  region net of3: 47.371,33.529 46.228,34.672 46.228,39.503 48.525,41.8 50.15,41.8 51.562,40.388 51.562,34.545 50.546,33.529
  region: 53.467,38.736 53.467,32.005 54.102,31.37 58.039,31.37 58.801,32.132 58.801,39.274 54.005,39.274
  region net faz: 62.611,31.37 62.738,31.497 62.611,31.37 60.96,31.37 60.452,31.878 60.452,38.998 64.714,42.672 65.913,42.672 65.913,32.513 64.77,31.37 61.595,31.37
  pour cut-out: 93.678,45.316 113.809,45.316 113.809,30.711 93.807,30.711
  pour cut-out: 93.803,62.334 113.682,62.334 113.682,47.221 93.936,47.221
  pour cut-out: 93.806,79.225 113.682,79.225 113.682,64.366 93.937,64.366

## Silkscreen, mask and mechanical layers (free items; w line width, h text height)
Top Overlay:
  drawing of 44 lines, arcs and shapes, not listed
Bottom Overlay:
  drawing of 87 lines, arcs and shapes, not listed
Mechanical 2:
  lines w0.2: 27.686,80.264 160.909,80.264 ; 29.21,77.089 29.21,151.892 ; 41.021,29.972 161.417,29.972 ; 79.375,76.835 79.375,151.892
Mechanical 13:
  lines w0.2: 29.21,74.169 34.417,79.376 ; 80.017,29.939 80.017,79.87 ; 80.134,29.822 129.948,29.822 ; 80.134,79.987 129.948,79.987 ; 130.065,29.939 130.065,79.87
  lines w0.254: 29.21,74.169 29.21,35.465 34.067,30.608 70.433,30.608 75.565,35.74 75.565,74.26 70.449,79.376 34.417,79.376

## Text inside footprints (layer, text, board x,y; h text height)
U1: Top Overlay "+" at 73.765,47.924 h0.81 r270; Top Overlay "-" at 71.475,47.925 h0.81 r270